# Altium PCB Mach_In.PcbDoc
Units mm, origin at the board's own origin, x right, y up, seen from the top; angles counter-clockwise.
Board outline 70 x 60 mm, 2 copper layers (Top Layer, Bottom Layer); 8 components, 9 nets, 55 pads, 0 vias.
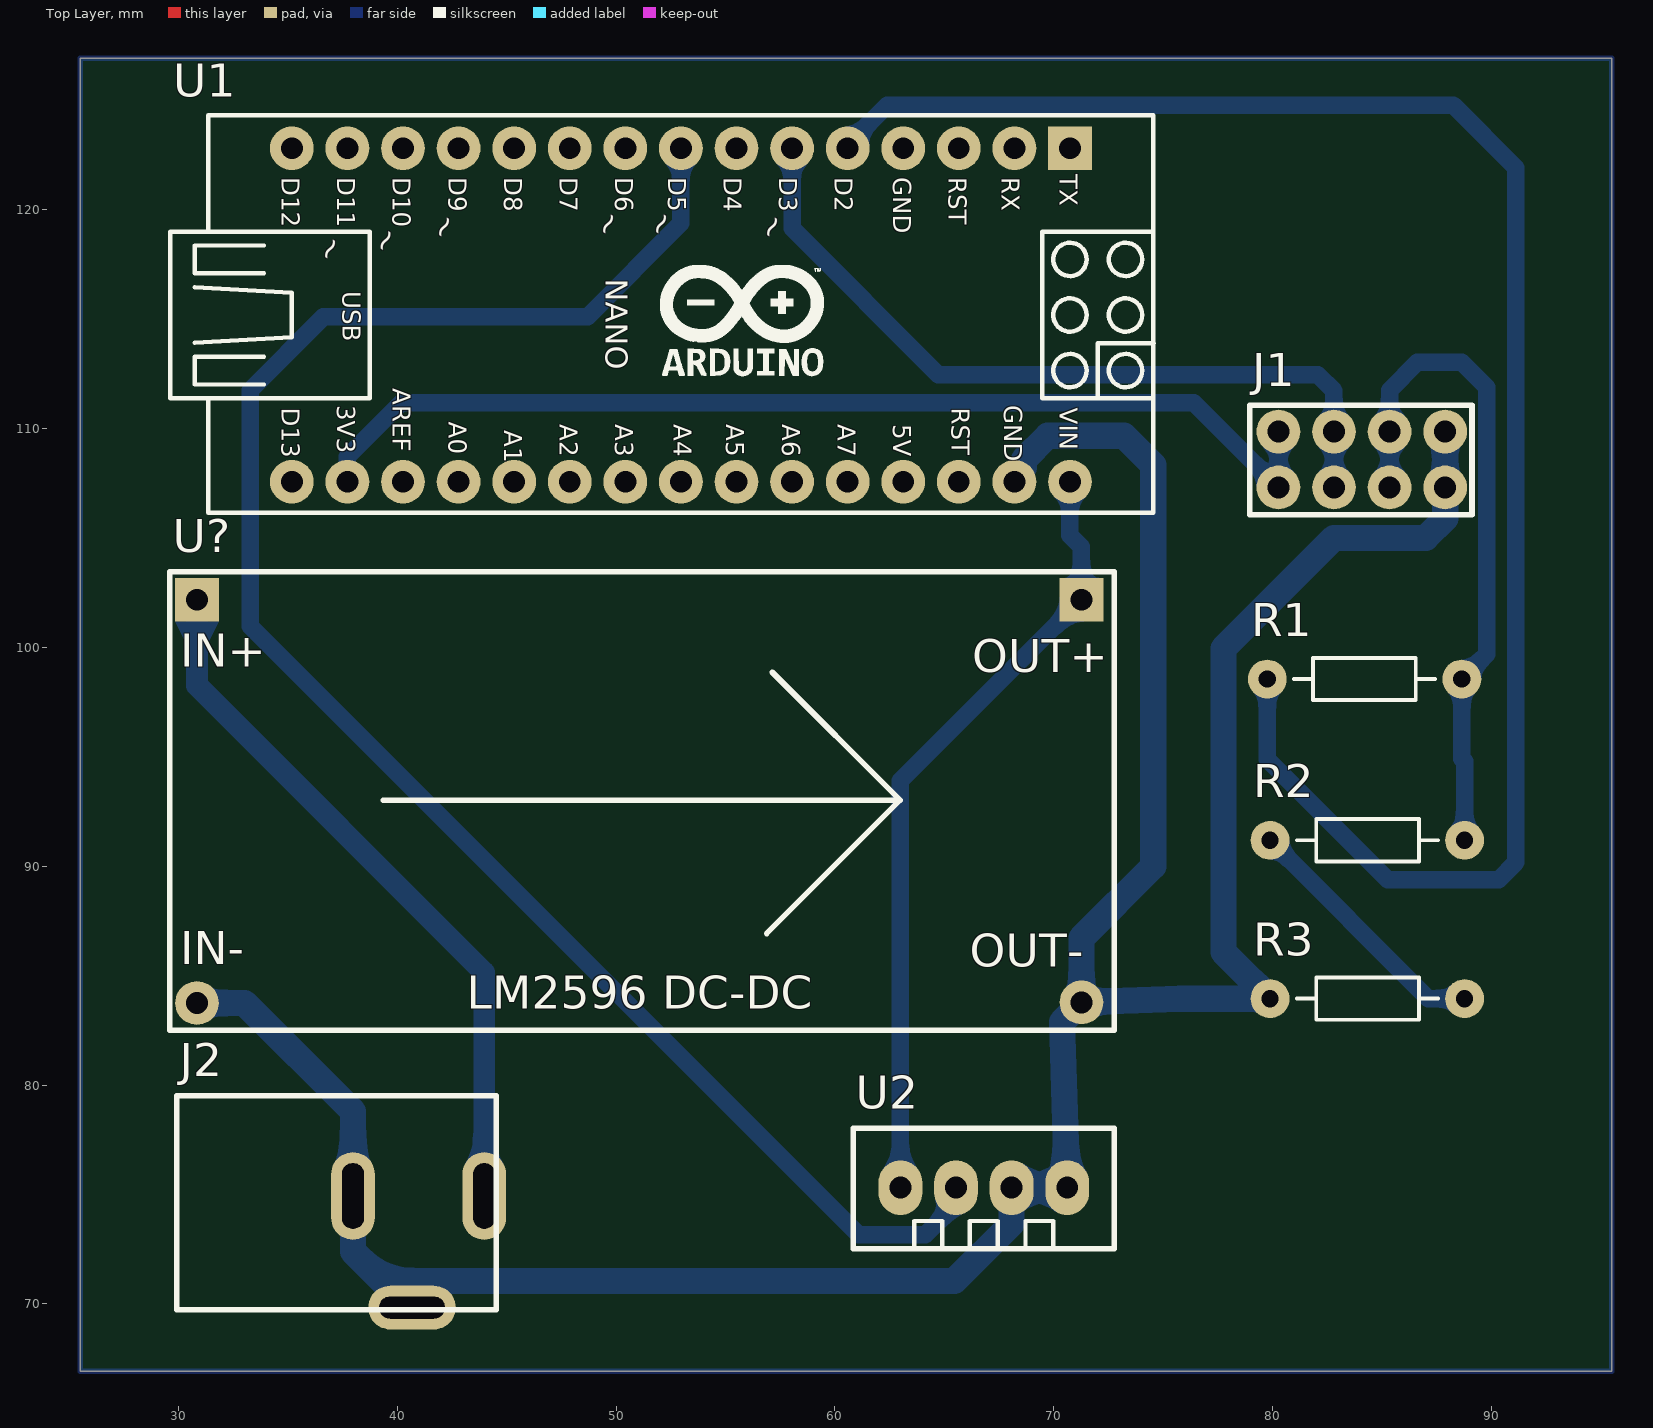
[diagram p0: Top Layer view]
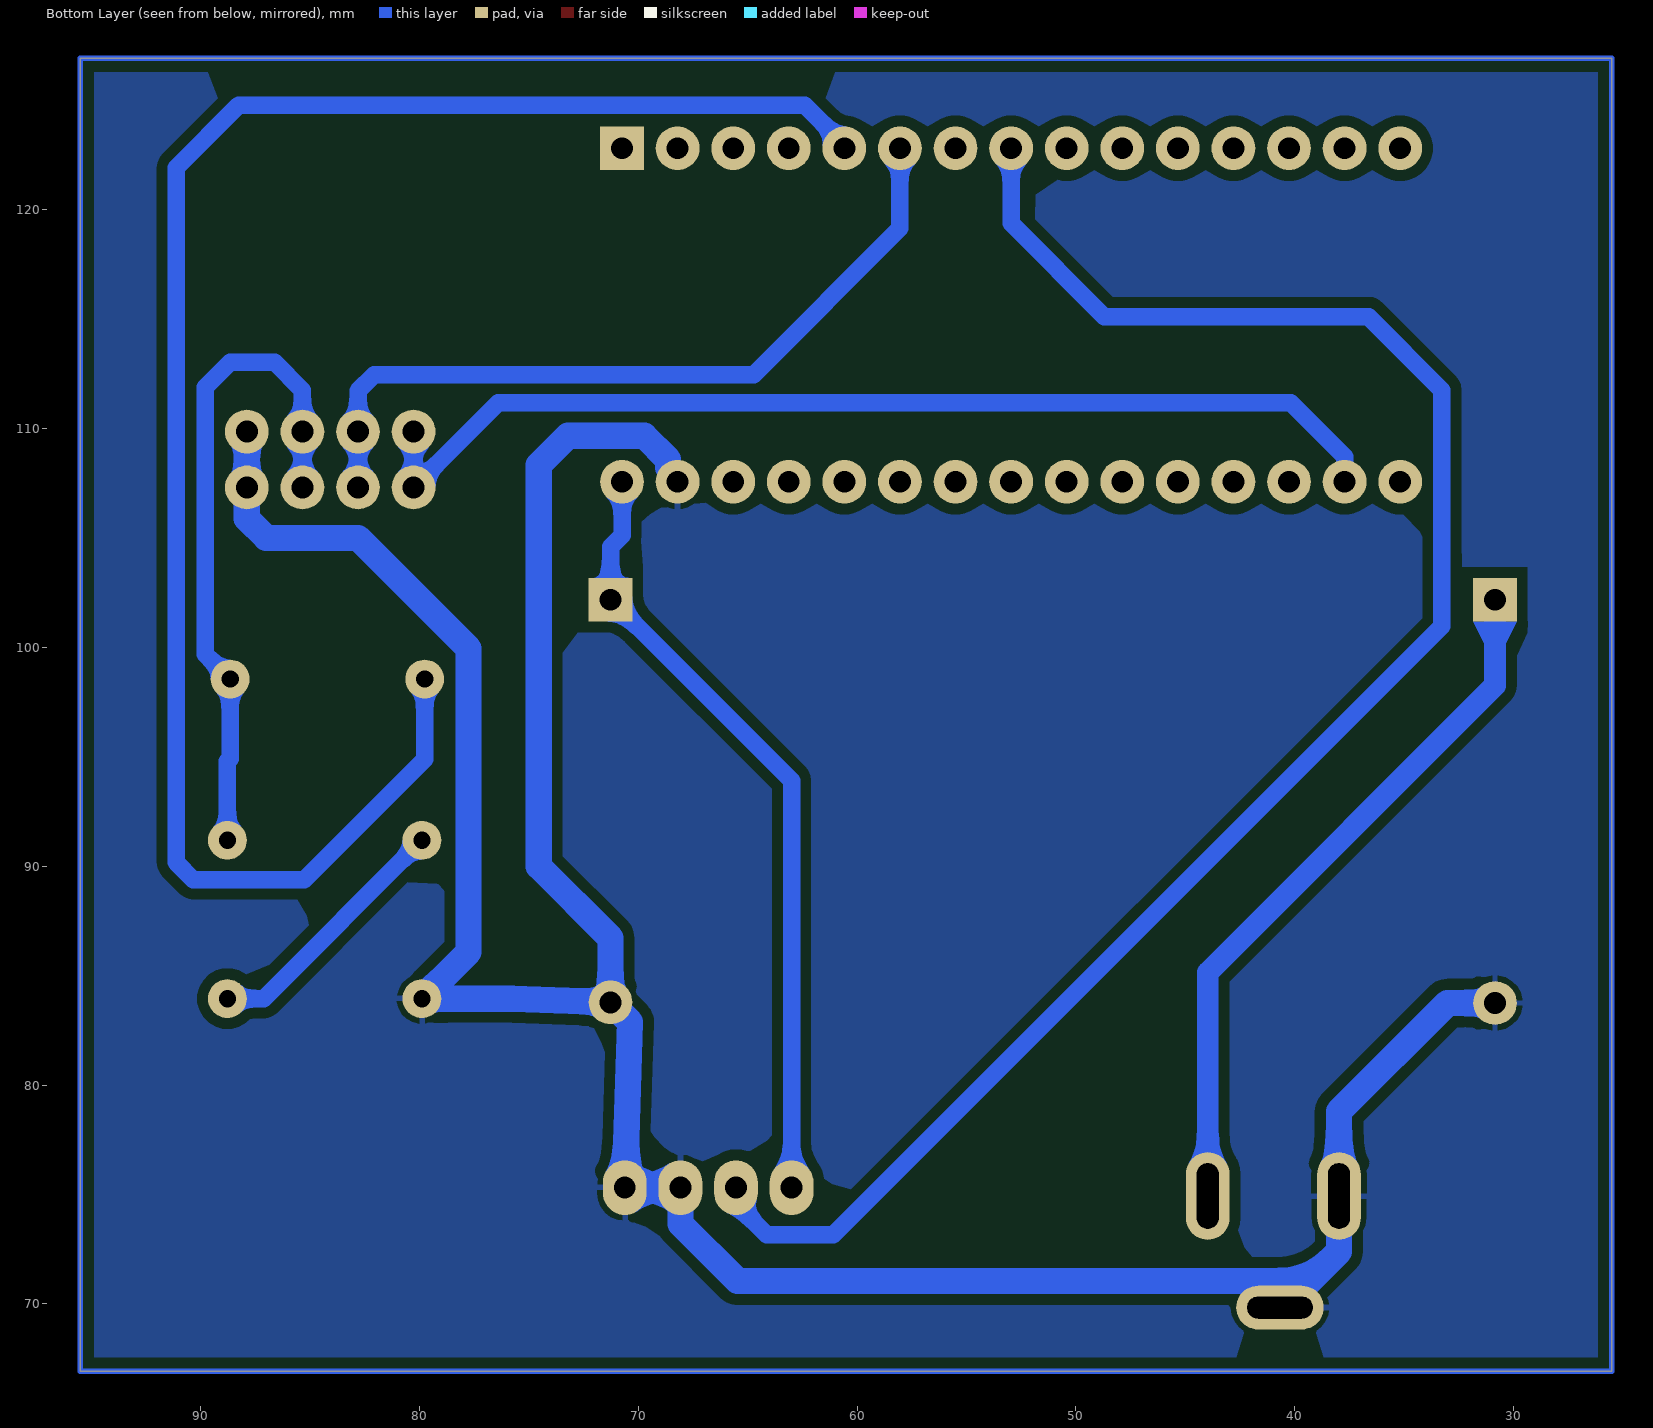
[diagram p1: Bottom Layer view, seen from below]
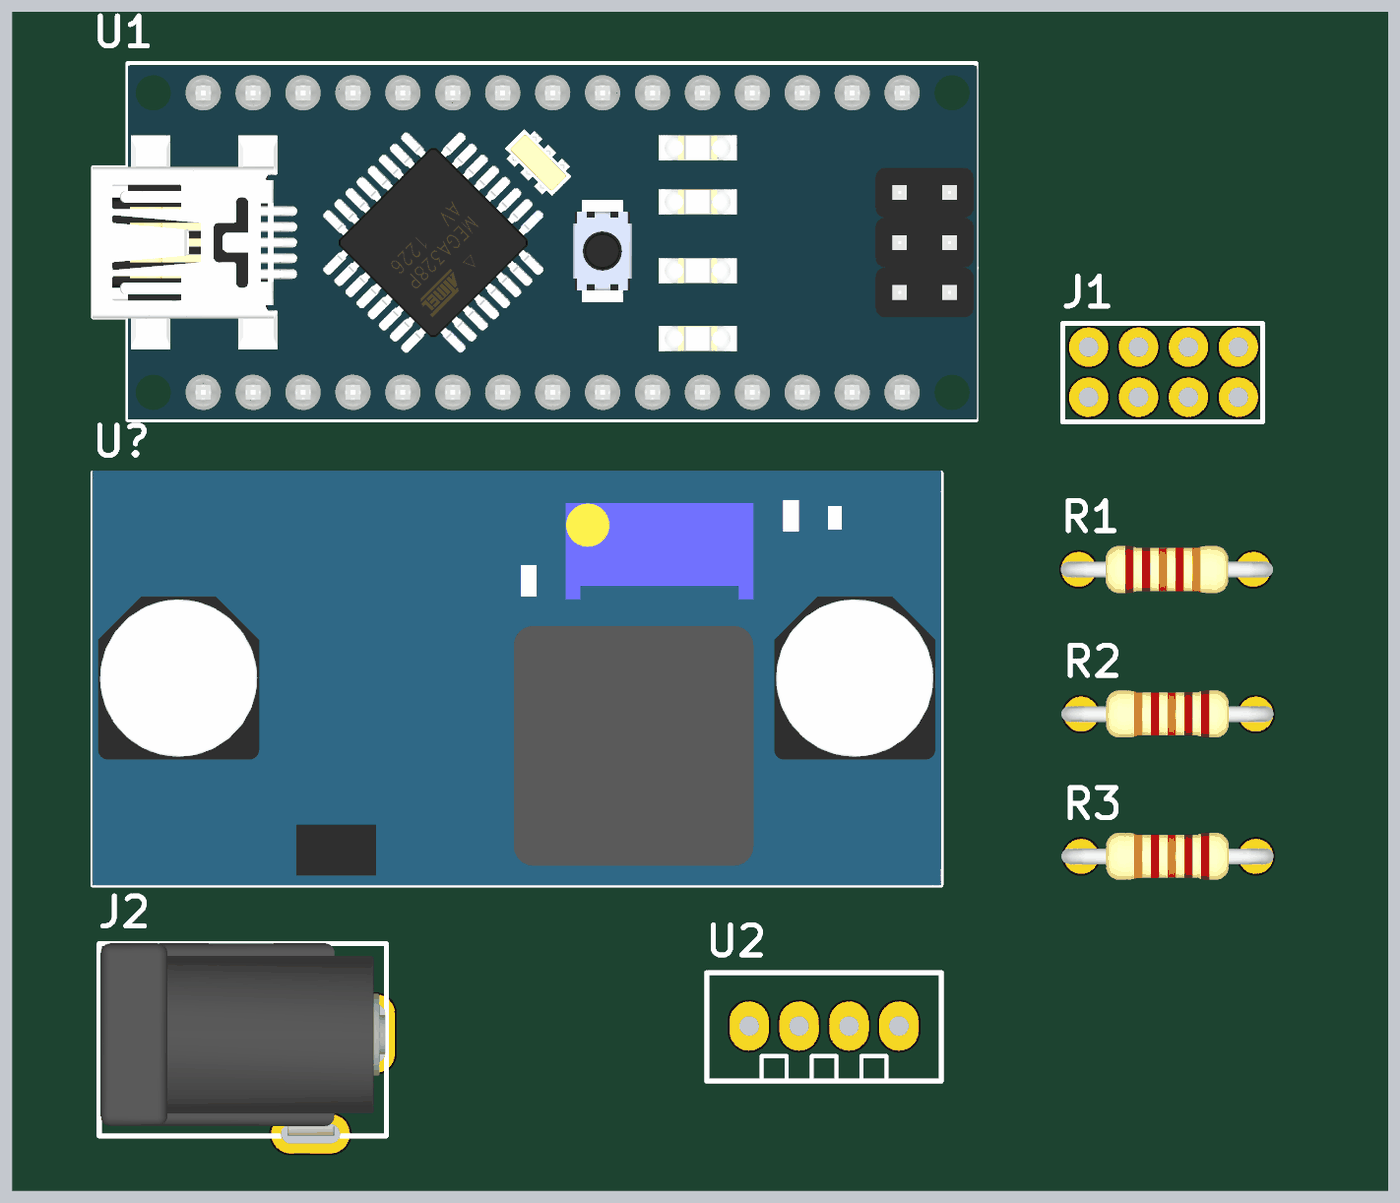
[diagram p2: 3D render of the assembled board from above, using the file's embedded part models]

## Layer stack, top to bottom
Top Solder: solder mask 0.0102, Solder Resist, Dk 3.5
Top Layer: signal copper 0.0356
Dielectric 1: dielectric 0.32, FR-4, Dk 4.8
Bottom Layer: signal copper 0.0356
Bottom Solder: solder mask 0.0102, Solder Resist, Dk 3.5

## Board outline
25.504,66.929 25.504,126.929 95.504,126.929 95.504,66.929

## Design rules (kind name [scope] priority, off if disabled: settings)
Clearance [All] p1: gap=0.5 ignorepadtopadclearanceinfootprint=FALSE
PolygonConnect [All] p1: connectstyle=Relief reliefconductorwidth=0.254 reliefentries=4 polygonreliefangle="90 Angle" airgapwidth=0.254
RoutingLayers [All] p1: top layer_v5=FALSE bottom layer_v5=TRUE
RoutingVias [All] p1: holewidth=0.711 width=1.27 viastyle="Through Hole" minholewidth=0.711 minwidth=1.27 maxholewidth=0.711 maxwidth=1.27
SolderMaskExpansion [All] p1: expansion=0.102 istentingtop=FALSE
SupplyNets "Schematic Supply Nets_3" [InNet('12V')] p1: voltage=0.000
SupplyNets "Schematic Supply Nets_2" [InNet('+3.3')] p2: voltage=0.000
SupplyNets "Schematic Supply Nets_1" [InNet('+5')] p3: voltage=0.000
SupplyNets "Schematic Supply Nets" [InNet('GND')] p4: voltage=0.000
Width GND [InNet('GND')] p1: maxlimit=1.2 minlimit=1.2 preferedwidth=1.2
Width 12V [InNet('12V')] p2: maxlimit=1 minlimit=1 preferedwidth=1
Width 5V [All] p3: maxlimit=0.8 minlimit=0.8 preferedwidth=0.8
Width 3.3V [InNet('+3.3')] p4: maxlimit=0.8 minlimit=0.8 preferedwidth=0.8
Width NET [All] p5: maxlimit=0.5 minlimit=0.5 preferedwidth=0.5
29 further rules are at their usual default settings.

## Components (designator, comment, footprint, x,y, rotation, side; value= is the part's Value field where it differs from the comment)
J1 "FEMALE-2.54-4x2P" FEMALE-2.54-4x2P 84.074,108.585 r90 top
J2 "JACK_P4" JACK_P4 37.226,74.612 r180 top
R1 "1k" R1/4W 88.646,98.552 r180 top value="R1/4W - 1K"
R2 "1k" R1/4W 79.883,91.186 r0 top value="R1/4W - 1K"
R3 "1k" R1/4W 79.883,83.947 r0 top value="R1/4W - 1K"
U1 "ARDUINO_NANO" ARDUINO_NANO 52.959,115.189 r270 top
U2 "DHT11" DHT11 66.802,75.311 r270 top
U? "MODULE_LM2596" MODULE_LM2596 51.054,92.964 r0 top

## Footprints (in the part's own frame and the unit in brackets; to place one, negate y for a bottom-side part, rotate by r counter-clockwise, add the part's x,y. Pads: shape width x height; smd on the part's side, far side on the other; paste and mask are expansions set on the pad)
ARDUINO_NANO [mm] "Based on ATmega328P, clock 16MHz, flash 32KB, 14 Digital Pins, 8 Analog Pins, 5V, Vin 7-12V."
  rect 2x2 hole 1: 1(-7.62,17.78)
  round 2 hole 1: 2(-7.62,15.24) 3(-7.62,12.7) 4(-7.62,10.16) 5(-7.62,7.62) 6(-7.62,5.08) 7(-7.62,2.54) 8(-7.62,0) 9(-7.62,-2.54) 10(-7.62,-5.08) 11(-7.62,-7.62) 12(-7.62,-10.16) 13(-7.62,-12.7) 14(-7.62,-15.24) 15(-7.62,-17.78) 16(7.62,-17.78) 17(7.62,-15.24) 18(7.62,-12.7) 19(7.62,-10.16) 20(7.62,-7.62) 21(7.62,-5.08) 22(7.62,-2.54) 23(7.62,0) 24(7.62,2.54) 25(7.62,5.08) 26(7.62,7.62) 27(7.62,10.16) 28(7.62,12.7) 29(7.62,15.24) 30(7.62,17.78)
  silkscreen extent -9.12,-23.34 9.04,21.62, body extent -8.99,-23.36 9.01,21.64, height 12.64
DHT11 [mm] "SENSOR HUMIDITY/TEMPERATURE"
  oval 2.5x2 hole 1: 1(0,-3.81) 2(0,-1.27) 3(0,1.27) 4(0,3.81)
  silkscreen extent -2.71,-5.97 2.79,5.97, body extent -2.71,-6 2.79,6, height 15.5
FEMALE-2.54-4x2P [mm]
  round 2 hole 1: 1(-1.275,3.81) 2(-1.275,1.27) 3(-1.275,-1.27) 4(-1.275,-3.81) 5(1.275,-3.81) 6(1.275,-1.27) 7(1.275,1.27) 8(1.275,3.81)
  silkscreen extent -2.52,-5.04 2.48,5.12, body extent -2.27,-4.77 2.27,4.85, height 8.6
JACK_P4 [mm]
  oval 2x4 hole 1 slot 3 at 90 deg: 1(-6.746,-0.318) 2(-0.747,-0.318)
  oval 4x2 hole 1 slot 3 at 0 deg: 3(-3.447,4.783)
  silkscreen extent -7.3,-4.89 7.3,4.89, body extent -7.27,-4.92 7.23,4.88, height 11.38
MODULE_LM2596 [mm] "MODULE BUCK STEP DOWN 3A 43x20mm"
  round 2 hole 1: 1(20.21,-9.185) 4(-20.21,-9.215)
  rect 2x2 hole 1: 2(20.21,9.215) 3(-20.21,9.215)
  silkscreen extent -21.45,-10.47 21.7,10.49, body extent -21.49,-10.49 21.71,10.61, height 13.15
R1/4W [mil] "R 1/4W, 2 Pin, 350mil"
  round 70 hole 31: 1(0,0) 2(350,0)
  silkscreen extent 48,-38 302,38, body extent -40,-47 386,47, height 111

## Part data
J1: "Female Header Connector 2.54mm 4x2 Pins.", JLCPCB PN=C2977588
J2: "9V Battery Connector Jack P4."
R1 R2 R3: library part R1/4W, "Resistor 1/4W"
U1: "Based on ATmega328P, Clock 16MHz, Flash 32KB, 14 Digital Pins, 8 Analog Pins, 5V, Vin 7-12V.", ComponentLink1Description=Datasheet, ComponentLink1URL=https://ww1.microchip.com/downloads/en/DeviceDoc/Atmel-7810-Automotive-Microcontrollers-ATmega328P_Datasheet.pdf
U2: "SENSOR HUMIDITY/TEMPERATURE", Digikey PN=1528-1228-ND
U?: "MODULE BUCK STEP DOWN 3A 43x20mm", ComponentLink1Description=Datasheet, ComponentLink1URL=https://www.ti.com/lit/ds/symlink/lm2596.pdf

## Nets (pads, with @x,y where several pads share a name; then routed paths per layer and width w, separated by ;. In a path a pad name is that pad's centre, name@x,y a point inside that pad or via, vN(x,y) a via of type N, cw(c..) or ccw(c..) an arc to the next point about the centre after c; other vN are vias at no path point)
12V: J2.1 U?.3 | length 32.7
  Bottom Layer w1: U?.3 30.844,98.264 43.973,85.135 J2.1
+3.3: J1.1 J1.8 U1.17 | length 48.9
  Bottom Layer w0.8: U1.17 37.719,108.712 40.176,111.169 76.405,111.169 J1.1 J1.8
+5: U1.30 U2.1 U?.2 | length 35.9
  Bottom Layer w0.8: U2.1 62.992,93.907 U?.2 71.264,104.597 70.739,105.122 U1.30
GND: J1.4 J1.5 J2.2 J2.3 R3.1 U1.29 U2.3 U2.4 U?.1 U?.4 | length 138.3
  Bottom Layer w1.2: U?.4 33.02,83.749 37.973,78.796 J2.2 37.973,72.39 39.319,71.044 ; J2.3 39.319,71.044 ; U1.29 68.199,107.785 68.639,108.225 68.639,108.585 69.723,109.669 73.211,109.669 74.549,108.331 74.549,90.001 71.264,86.716 U?.1 ; J1.5 J1.4 87.884,105.893 86.995,105.004 82.804,105.004 77.749,99.949 77.749,86.081 R3.1 75.758,83.947 U?.1 ; 39.319,71.044 65.456,71.044 68.072,73.66 U2.3 U2.4 70.371,82.886 U?.1
NetR2_1: R2.1 R3.2 | length 11.9
  Bottom Layer w0.8: R2.1 87.122,83.947 R3.2
RX_Zigbee_3.3V: J1.3 J1.6 R1.1 R2.2 | length 31.1
  Bottom Layer w0.8: J1.3 J1.6 85.344,111.76 86.614,113.03 88.646,113.03 89.789,111.887 89.789,99.695 R1.1 88.646,94.92 88.773,94.793 R2.2
RX_Zigbee_5V: R1.2 U1.5 | length 82
  Bottom Layer w0.8: U1.5 60.579,122.956 62.388,124.765 88.265,124.765 91.11,121.92 91.11,90.17 90.322,89.383 85.268,89.383 79.756,94.894 R1.2
SIG_DHT11: U1.8 U2.2 | length 82.2
  Bottom Layer w0.8: U1.8 52.959,119.38 48.692,115.113 36.627,115.113 33.274,111.76 33.274,100.965 61.087,73.152 64.135,73.152 65.532,74.549 U2.2
TX_Zigbee: J1.2 J1.7 U1.6 | length 35.9
  Bottom Layer w0.8: U1.6 58.039,119.151 64.721,112.469 82.07,112.469 82.804,111.735 J1.7 J1.2
pads on no net: U1.1 U1.2 U1.3 U1.4 U1.7 U1.9 U1.10 U1.11 U1.12 U1.13 U1.14 U1.15 U1.16 U1.18 U1.19 U1.20 U1.21 U1.22 U1.23 U1.24 U1.25 U1.26 U1.27 U1.28
copper on no net: | length 260
  Bottom Layer w0.254: 25.504,66.929 95.504,66.929 95.504,126.929 25.504,126.929 25.504,66.929

## Polygon pours and split planes (outlines as drawn)
GND on Bottom Layer "GND_L02_P000" (solid, remove dead copper, pour order 0): 25.654,126.746 26.035,127.127 95.377,127.127 95.377,67.183 95.504,67.056 95.123,66.675 25.527,66.675

## Text inside footprints (layer, text, board x,y; h text height)
U1: Top Overlay "NANO" at 49.53,116.84 h1.02 r270; Top Overlay "USB" at 37.516,116.281 h0.81 r270; Top Overlay "D13" at 34.722,110.947 h0.81 r270; Top Overlay "3V3" at 37.262,111.074 h0.81 r270; Top Overlay "AREF" at 39.802,111.836 h0.81 r270; Top Overlay "A0" at 42.342,110.312 h0.81 r270; Top Overlay "A1" at 44.882,109.931 h0.81 r270; Top Overlay "A2" at 47.422,110.185 h0.81 r270; Top Overlay "A3" at 49.962,110.185 h0.81 r270; Top Overlay "A4" at 52.629,110.185 h0.81 r270; Top Overlay "A5" at 55.042,110.185 h0.81 r270; Top Overlay "A6" at 57.582,110.185 h0.81 r270; Top Overlay "A7" at 60.122,110.185 h0.81 r270; Top Overlay "5V" at 62.662,110.185 h0.81 r270; Top Overlay "RST" at 65.329,110.947 h0.81 r270; Top Overlay "D12" at 34.722,121.488 h0.81 r270; Top Overlay "D11" at 37.262,121.488 h0.81 r270; Top Overlay "D10" at 39.802,121.488 h0.81 r270; Top Overlay "D9" at 42.342,121.488 h0.81 r270; Top Overlay "D8" at 44.882,121.488 h0.81 r270; Top Overlay "D7" at 47.422,121.488 h0.81 r270; Top Overlay "D6" at 49.962,121.488 h0.81 r270; Top Overlay "D5" at 52.375,121.488 h0.81 r270; Top Overlay "D4" at 54.915,121.488 h0.81 r270; Top Overlay "D3" at 57.455,121.488 h0.81 r270; Top Overlay "D2" at 59.995,121.488 h0.81 r270; Top Overlay "VIN" at 70.282,110.947 h0.81 r270; Top Overlay "GND" at 67.742,111.074 h0.81 r270; Top Overlay "GND" at 62.662,121.488 h0.81 r270; Top Overlay "RST" at 65.202,121.488 h0.81 r270; Top Overlay "RX" at 67.615,121.488 h0.81 r270; Top Overlay "TX" at 70.282,121.615 h0.81 r270; Top Overlay "~" at 57.043,119.939 h1.02 r240; Top Overlay "~" at 51.963,120.066 h1.02 r240; Top Overlay "~" at 49.55,120.066 h1.02 r240; Top Overlay "~" at 36.85,118.923 h1.02 r240; Top Overlay "~" at 39.39,119.304 h1.02 r240; Top Overlay "~" at 42.057,119.939 h1.02 r240
U?: Top Overlay "LM2596 DC-DC" at 43.163,83.495 h1.52; Top Overlay "OUT+" at 66.277,98.862 h1.52; Top Overlay "IN-" at 30.082,85.527 h1.52; Top Overlay "IN+" at 30.082,99.116 h1.52; Top Overlay "OUT-" at 66.15,85.4 h1.52